# Altium PCB PCB-FPGA.PcbDoc
Units mil, origin at the board's own origin, x right, y up, seen from the top; angles counter-clockwise.
Board outline 6000 x 4000 mil, 2 copper layers (Top Layer, Bottom Layer); 316 components, 208 nets, 804 pads, 0 vias.
Unrouted connection lines stored in the file: 144.
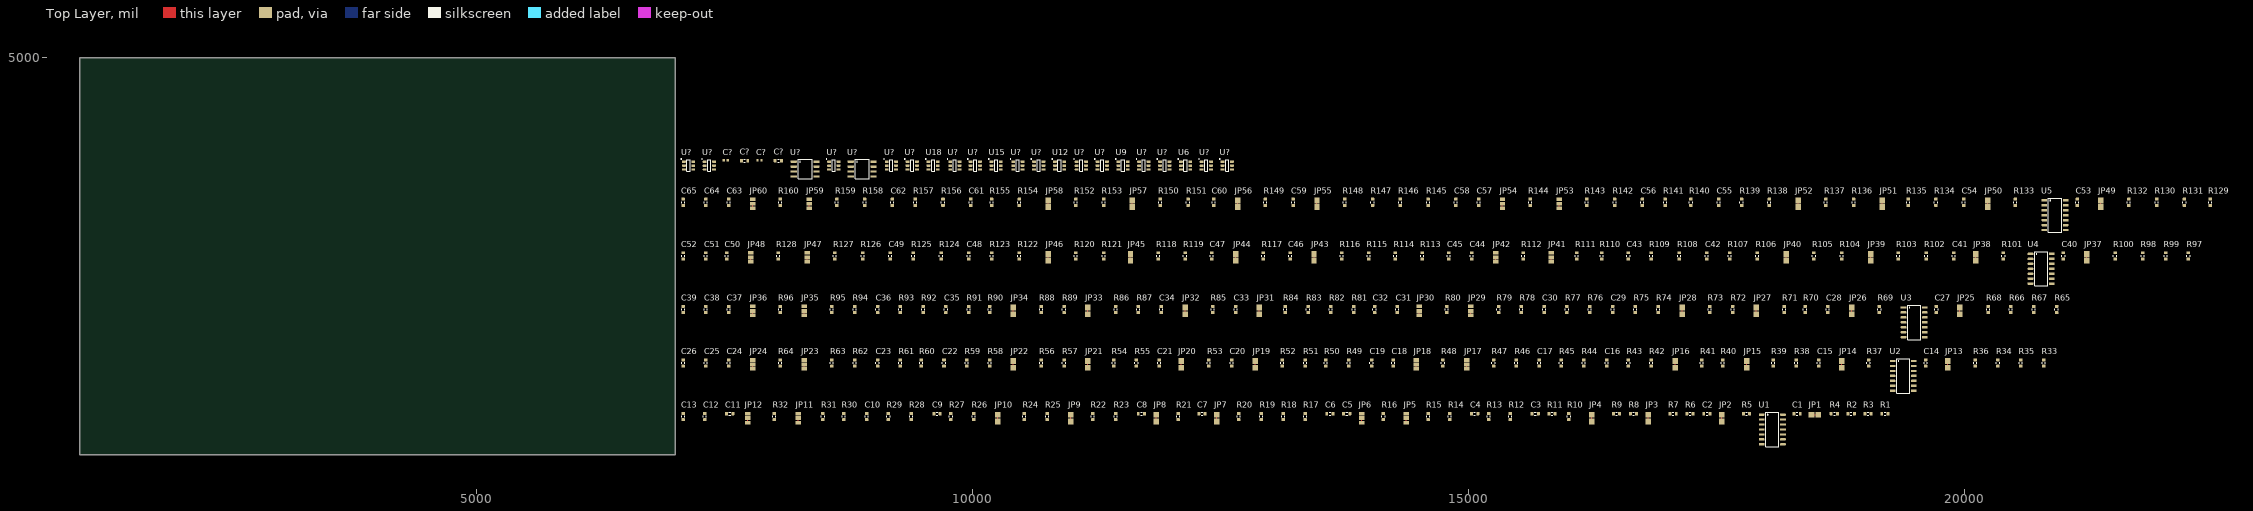
[diagram p0: Top Layer view]
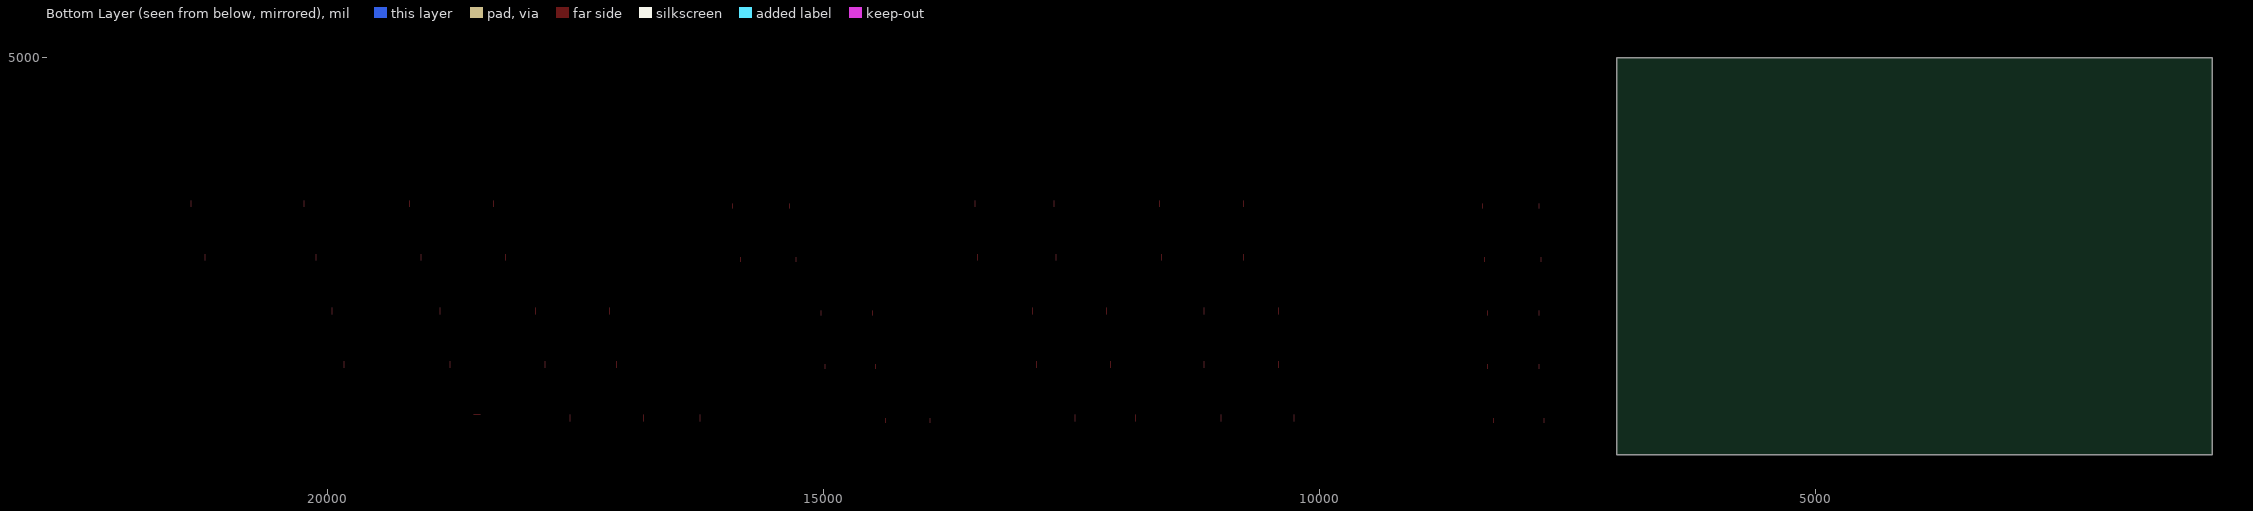
[diagram p1: Bottom Layer view, seen from below]

## Layer stack, top to bottom
Top Solder: solder mask 0.4, Solder Resist, Dk 3.5
Top Layer: signal copper 1.4
Dielectric 1: dielectric 12.6, FR-4, Dk 4.8
Bottom Layer: signal copper 1.4
Bottom Solder: solder mask 0.4, Solder Resist, Dk 3.5

## Board outline
1000,1000 7000,1000 7000,5000 1000,5000

## Design rules (kind name [scope] priority, off if disabled: settings)
Clearance [All] p1: gap=10 ignorepadtopadclearanceinfootprint=FALSE except(0: Arc-Hole Track-Hole SMDPad-Hole THPad-Hole Via-Hole Fill-Hole Poly-Hole Region-Hole Text-Hole)
PolygonConnect [All] p1: connectstyle=Relief reliefconductorwidth=10 reliefentries=4 polygonreliefangle="90 Angle" airgapwidth=10
RoomDefinition FPGA-6 [InComponentClass('FPGA-6')] p1: confinementstyle=ConfineIn formatcopy=TRUE lockcomponents=FALSE outline 7045,3760 12650,3760 12650,4100 7045,4100
RoomDefinition FPGA-5 [InComponentClass('FPGA-5')] p2: confinementstyle=ConfineIn formatcopy=TRUE lockcomponents=FALSE outline 7045,3220 22685,3220 22685,3710 7045,3710
RoomDefinition FPGA-4 [InComponentClass('FPGA-4')] p3: confinementstyle=ConfineIn formatcopy=TRUE lockcomponents=FALSE outline 7045,2680 22415,2680 22415,3170 7045,3170
RoomDefinition FPGA-3 [InComponentClass('FPGA-3')] p4: confinementstyle=ConfineIn formatcopy=TRUE lockcomponents=FALSE outline 7045,2140 21085,2140 21085,2630 7045,2630
RoomDefinition FPGA-2 [InComponentClass('FPGA-2')] p5: confinementstyle=ConfineIn formatcopy=TRUE lockcomponents=FALSE outline 7045,1600 20955,1600 20955,2090 7045,2090
RoomDefinition FPGA-1 [InComponentClass('FPGA-1')] p6: confinementstyle=ConfineIn formatcopy=TRUE lockcomponents=FALSE outline 7045,1060 19260,1060 19260,1550 7045,1550
RoutingVias [All] p1: holewidth=28 width=50 viastyle="Through Hole" minholewidth=28 minwidth=50 maxholewidth=28 maxwidth=50
SolderMaskExpansion [All] p1: expansion=4
Width [All] p1: maxlimit=10 minlimit=10 preferedwidth=10
30 further rules are at their usual default settings.

## Classes and differential pairs
component class FPGA-6: C? U6 U9 U12 U15 U18 U?
component class FPGA-5: C53 C54 C55 C56 C57 C58 C59 C60 C61 C62 C63 C64 C65 JP49 JP50 JP51 JP52 JP53 JP54 JP55 JP56 JP57 JP58 JP59 JP60 R129 R130 R131 R132 R133 R134 R135 R136 R137 R138 R139 R140 R141 R142 R143 R144 R145 R146 R147 R148 R149 R150 R151 R152 R153 R154 R155 R156 R157 R158 R159 R160 U5
component class FPGA-4: C40 C41 C42 C43 C44 C45 C46 C47 C48 C49 C50 C51 C52 JP37 JP38 JP39 JP40 JP41 JP42 JP43 JP44 JP45 JP46 JP47 JP48 R97 R98 R99 R100 R101 R102 R103 R104 R105 R106 R107 R108 R109 R110 R111 R112 R113 R114 R115 R116 R117 R118 R119 R120 R121 R122 R123 R124 R125 R126 R127 R128 U4
component class FPGA-3: C27 C28 C29 C30 C31 C32 C33 C34 C35 C36 C37 C38 C39 JP25 JP26 JP27 JP28 JP29 JP30 JP31 JP32 JP33 JP34 JP35 JP36 R65 R66 R67 R68 R69 R70 R71 R72 R73 R74 R75 R76 R77 R78 R79 R80 R81 R82 R83 R84 R85 R86 R87 R88 R89 R90 R91 R92 R93 R94 R95 R96 U3
component class FPGA-2: C14 C15 C16 C17 C18 C19 C20 C21 C22 C23 C24 C25 C26 JP13 JP14 JP15 JP16 JP17 JP18 JP19 JP20 JP21 JP22 JP23 JP24 R33 R34 R35 R36 R37 R38 R39 R40 R41 R42 R43 R44 R45 R46 R47 R48 R49 R50 R51 R52 R53 R54 R55 R56 R57 R58 R59 R60 R61 R62 R63 R64 U2
component class FPGA-1: C1 C2 C3 C4 C5 C6 C7 C8 C9 C10 C11 C12 C13 JP1 JP2 JP3 JP4 JP5 JP6 JP7 JP8 JP9 JP10 JP11 JP12 R1 R2 R3 R4 R5 R6 R7 R8 R9 R10 R11 R12 R13 R14 R15 R16 R17 R18 R19 R20 R21 R22 R23 R24 R25 R26 R27 R28 R29 R30 R31 R32 U1

## Components (designator, comment, footprint, x,y, rotation, side; value= is the part's Value field where it differs from the comment)
C1 "47p" "CAPACITOR 1608 REFLOW" 18310,1415 r0 top
C2 "47p" "CAPACITOR 1608 REFLOW" 17400,1415 r0 top
C3 "2n2" "CAPACITOR 1608 REFLOW" 15670,1415 r0 top
C4 "2n2" "CAPACITOR 1608 REFLOW" 15060,1415 r0 top
C5 "47p" "CAPACITOR 1608 REFLOW" 13770,1415 r0 top
C6 "47p" "CAPACITOR 1608 REFLOW" 13600,1415 r0 top
C7 "47p" "CAPACITOR 1608 REFLOW" 12310,1415 r0 top
C8 "47p" "CAPACITOR 1608 REFLOW" 11700,1415 r0 top
C9 "2n2" "CAPACITOR 1608 REFLOW" 9640,1415 r0 top
C10 "2n2" "CAPACITOR 1608 REFLOW" 8930,1385 r90 top
C11 "47p" "CAPACITOR 1608 REFLOW" 7550,1415 r0 top
C12 "47p" "CAPACITOR 1608 REFLOW" 7300,1385 r90 top
C13 "100n" "CAPACITOR 1608 REFLOW" 7080,1385 r90 top
C14 "47p" "CAPACITOR 1608 REFLOW" 19605,1925 r90 top
C15 "47p" "CAPACITOR 1608 REFLOW" 18530,1925 r90 top
C16 "2n2" "CAPACITOR 1608 REFLOW" 16390,1925 r90 top
C17 "2n2" "CAPACITOR 1608 REFLOW" 15710,1925 r90 top
C18 "47p" "CAPACITOR 1608 REFLOW" 14240,1925 r90 top
C19 "47p" "CAPACITOR 1608 REFLOW" 14020,1925 r90 top
C20 "47p" "CAPACITOR 1608 REFLOW" 12610,1925 r90 top
C21 "47p" "CAPACITOR 1608 REFLOW" 11880,1925 r90 top
C22 "2n2" "CAPACITOR 1608 REFLOW" 9710,1925 r90 top
C23 "2n2" "CAPACITOR 1608 REFLOW" 9040,1925 r90 top
C24 "47p" "CAPACITOR 1608 REFLOW" 7540,1925 r90 top
C25 "47p" "CAPACITOR 1608 REFLOW" 7310,1925 r90 top
C26 "100n" "CAPACITOR 1608 REFLOW" 7080,1925 r90 top
C27 "47p" "CAPACITOR 1608 REFLOW" 19715,2465 r90 top
C28 "47p" "CAPACITOR 1608 REFLOW" 18620,2465 r90 top
C29 "2n2" "CAPACITOR 1608 REFLOW" 16450,2465 r90 top
C30 "2n2" "CAPACITOR 1608 REFLOW" 15760,2465 r90 top
C31 "47p" "CAPACITOR 1608 REFLOW" 14280,2465 r90 top
C32 "47p" "CAPACITOR 1608 REFLOW" 14050,2465 r90 top
C33 "47p" "CAPACITOR 1608 REFLOW" 12650,2465 r90 top
C34 "47p" "CAPACITOR 1608 REFLOW" 11900,2465 r90 top
C35 "2n2" "CAPACITOR 1608 REFLOW" 9730,2465 r90 top
C36 "2n2" "CAPACITOR 1608 REFLOW" 9040,2465 r90 top
C37 "47p" "CAPACITOR 1608 REFLOW" 7540,2465 r90 top
C38 "47p" "CAPACITOR 1608 REFLOW" 7310,2465 r90 top
C39 "100n" "CAPACITOR 1608 REFLOW" 7080,2465 r90 top
C40 "47p" "CAPACITOR 1608 REFLOW" 20995,3005 r90 top
C41 "47p" "CAPACITOR 1608 REFLOW" 19890,3005 r90 top
C42 "2n2" "CAPACITOR 1608 REFLOW" 17400,3005 r90 top
C43 "2n2" "CAPACITOR 1608 REFLOW" 16610,3005 r90 top
C44 "47p" "CAPACITOR 1608 REFLOW" 15030,3005 r90 top
C45 "47p" "CAPACITOR 1608 REFLOW" 14800,3005 r90 top
C46 "47p" "CAPACITOR 1608 REFLOW" 13200,3005 r90 top
C47 "47p" "CAPACITOR 1608 REFLOW" 12410,3005 r90 top
C48 "2n2" "CAPACITOR 1608 REFLOW" 9960,3005 r90 top
C49 "2n2" "CAPACITOR 1608 REFLOW" 9170,3005 r90 top
C50 "47p" "CAPACITOR 1608 REFLOW" 7520,3005 r90 top
C51 "47p" "CAPACITOR 1608 REFLOW" 7310,3005 r90 top
C52 "100n" "CAPACITOR 1608 REFLOW" 7080,3005 r90 top
C53 "47p" "CAPACITOR 1608 REFLOW" 21135,3545 r90 top
C54 "47p" "CAPACITOR 1608 REFLOW" 19990,3545 r90 top
C55 "2n2" "CAPACITOR 1608 REFLOW" 17520,3545 r90 top
C56 "2n2" "CAPACITOR 1608 REFLOW" 16750,3545 r90 top
C57 "47p" "CAPACITOR 1608 REFLOW" 15100,3545 r90 top
C58 "47p" "CAPACITOR 1608 REFLOW" 14870,3545 r90 top
C59 "47p" "CAPACITOR 1608 REFLOW" 13230,3545 r90 top
C60 "47p" "CAPACITOR 1608 REFLOW" 12430,3545 r90 top
C61 "2n2" "CAPACITOR 1608 REFLOW" 9980,3545 r90 top
C62 "2n2" "CAPACITOR 1608 REFLOW" 9190,3545 r90 top
C63 "47p" "CAPACITOR 1608 REFLOW" 7540,3545 r90 top
C64 "47p" "CAPACITOR 1608 REFLOW" 7310,3545 r90 top
C65 "100n" "CAPACITOR 1608 REFLOW" 7080,3545 r90 top
C? "10uF" "CAPACITOR 1608 REFLOW" 7700,3965 r0 top
C? "100nF" "CAPACITOR 1005 REFLOW" 7510,3970 r0 top
C? "10uF" "CAPACITOR 1608 REFLOW" 8040,3965 r0 top
C? "100nF" "CAPACITOR 1005 REFLOW" 7850,3970 r0 top
JP1 "NC" "JUMPER2 SMD 2012 Connected" 18490,1405 r0 top
JP2 "NC" "JUMPER2 SMD 2012 Connected" 17550,1370 r90 top
JP3 "NC" "JUMPER2 SMD 2012 Connected" 16810,1370 r90 top
JP4 "NC" "JUMPER2 SMD 2012 Connected" 16240,1370 r90 top
JP5 "{Value}" "JUMPER3 SMD 2012 Connected" 14370,1370 r90 top
JP6 "{Value}" "JUMPER3 SMD 2012 Connected" 13920,1370 r90 top
JP7 "NC" "JUMPER2 SMD 2012 Connected" 12460,1370 r90 top
JP8 "NC" "JUMPER2 SMD 2012 Connected" 11850,1370 r90 top
JP9 "NC" "JUMPER2 SMD 2012 Connected" 10990,1370 r90 top
JP10 "NC" "JUMPER2 SMD 2012 Connected" 10250,1370 r90 top
JP11 "{Value}" "JUMPER3 SMD 2012 Connected" 8240,1370 r90 top
JP12 "{Value}" "JUMPER3 SMD 2012 Connected" 7730,1370 r90 top
JP13 "NC" "JUMPER2 SMD 2012 Connected" 19830,1910 r90 top
JP14 "NC" "JUMPER2 SMD 2012 Connected" 18760,1910 r90 top
JP15 "NC" "JUMPER2 SMD 2012 Connected" 17800,1910 r90 top
JP16 "NC" "JUMPER2 SMD 2012 Connected" 17080,1910 r90 top
JP17 "{Value}" "JUMPER3 SMD 2012 Connected" 14980,1910 r90 top
JP18 "{Value}" "JUMPER3 SMD 2012 Connected" 14470,1910 r90 top
JP19 "NC" "JUMPER2 SMD 2012 Connected" 12850,1910 r90 top
JP20 "NC" "JUMPER2 SMD 2012 Connected" 12100,1910 r90 top
JP21 "NC" "JUMPER2 SMD 2012 Connected" 11160,1910 r90 top
JP22 "NC" "JUMPER2 SMD 2012 Connected" 10410,1910 r90 top
JP23 "{Value}" "JUMPER3 SMD 2012 Connected" 8300,1910 r90 top
JP24 "{Value}" "JUMPER3 SMD 2012 Connected" 7780,1910 r90 top
JP25 "NC" "JUMPER2 SMD 2012 Connected" 19950,2450 r90 top
JP26 "NC" "JUMPER2 SMD 2012 Connected" 18860,2450 r90 top
JP27 "NC" "JUMPER2 SMD 2012 Connected" 17900,2450 r90 top
JP28 "NC" "JUMPER2 SMD 2012 Connected" 17150,2450 r90 top
JP29 "{Value}" "JUMPER3 SMD 2012 Connected" 15020,2450 r90 top
JP30 "{Value}" "JUMPER3 SMD 2012 Connected" 14500,2450 r90 top
JP31 "NC" "JUMPER2 SMD 2012 Connected" 12890,2450 r90 top
JP32 "NC" "JUMPER2 SMD 2012 Connected" 12140,2450 r90 top
JP33 "NC" "JUMPER2 SMD 2012 Connected" 11160,2450 r90 top
JP34 "NC" "JUMPER2 SMD 2012 Connected" 10410,2450 r90 top
JP35 "{Value}" "JUMPER3 SMD 2012 Connected" 8300,2450 r90 top
JP36 "{Value}" "JUMPER3 SMD 2012 Connected" 7780,2450 r90 top
JP37 "NC" "JUMPER2 SMD 2012 Connected" 21230,2990 r90 top
JP38 "NC" "JUMPER2 SMD 2012 Connected" 20110,2990 r90 top
JP39 "NC" "JUMPER2 SMD 2012 Connected" 19050,2990 r90 top
JP40 "NC" "JUMPER2 SMD 2012 Connected" 18200,2990 r90 top
JP41 "{Value}" "JUMPER3 SMD 2012 Connected" 15830,2990 r90 top
JP42 "{Value}" "JUMPER3 SMD 2012 Connected" 15270,2990 r90 top
JP43 "NC" "JUMPER2 SMD 2012 Connected" 13440,2990 r90 top
JP44 "NC" "JUMPER2 SMD 2012 Connected" 12650,2990 r90 top
JP45 "NC" "JUMPER2 SMD 2012 Connected" 11590,2990 r90 top
JP46 "NC" "JUMPER2 SMD 2012 Connected" 10760,2990 r90 top
JP47 "{Value}" "JUMPER3 SMD 2012 Connected" 8330,2990 r90 top
JP48 "{Value}" "JUMPER3 SMD 2012 Connected" 7760,2990 r90 top
JP49 "NC" "JUMPER2 SMD 2012 Connected" 21370,3530 r90 top
JP50 "NC" "JUMPER2 SMD 2012 Connected" 20230,3530 r90 top
JP51 "NC" "JUMPER2 SMD 2012 Connected" 19170,3530 r90 top
JP52 "NC" "JUMPER2 SMD 2012 Connected" 18320,3530 r90 top
JP53 "{Value}" "JUMPER3 SMD 2012 Connected" 15910,3530 r90 top
JP54 "{Value}" "JUMPER3 SMD 2012 Connected" 15340,3530 r90 top
JP55 "NC" "JUMPER2 SMD 2012 Connected" 13470,3530 r90 top
JP56 "NC" "JUMPER2 SMD 2012 Connected" 12670,3530 r90 top
JP57 "NC" "JUMPER2 SMD 2012 Connected" 11610,3530 r90 top
JP58 "NC" "JUMPER2 SMD 2012 Connected" 10760,3530 r90 top
JP59 "{Value}" "JUMPER3 SMD 2012 Connected" 8350,3530 r90 top
JP60 "{Value}" "JUMPER3 SMD 2012 Connected" 7780,3530 r90 top
R1 "18k" "RESISTOR 1608 REFLOW" 19195,1415 r0 top
R2 "18k" "RESISTOR 1608 REFLOW" 18855,1415 r0 top
R3 "DNP" "RESISTOR 1608 REFLOW" 19025,1415 r0 top
R4 "DNP" "RESISTOR 1608 REFLOW" 18685,1415 r0 top
R5 "8k2" "RESISTOR 1608 REFLOW" 17800,1415 r0 top
R6 "8k2" "RESISTOR 1608 REFLOW" 17230,1415 r0 top
R7 "82R" "RESISTOR 1608 REFLOW" 17060,1415 r0 top
R8 "82R" "RESISTOR 1608 REFLOW" 16660,1415 r0 top
R9 "8k2" "RESISTOR 1608 REFLOW" 16490,1415 r0 top
R10 "8k2" "RESISTOR 1608 REFLOW" 16010,1385 r90 top
R11 "10k" "RESISTOR 1608 REFLOW" 15840,1415 r0 top
R12 "10k" "RESISTOR 1608 REFLOW" 15420,1385 r90 top
R13 "DNP" "RESISTOR 1608 REFLOW" 15200,1385 r90 top
R14 "DNP" "RESISTOR 1608 REFLOW" 14810,1385 r90 top
R15 "18k" "RESISTOR 1608 REFLOW" 14590,1385 r90 top
R16 "18k" "RESISTOR 1608 REFLOW" 14140,1385 r90 top
R17 "18k" "RESISTOR 1608 REFLOW" 13350,1385 r90 top
R18 "DNP" "RESISTOR 1608 REFLOW" 13130,1385 r90 top
R19 "18k" "RESISTOR 1608 REFLOW" 12910,1385 r90 top
R20 "DNP" "RESISTOR 1608 REFLOW" 12680,1385 r90 top
R21 "8k2" "RESISTOR 1608 REFLOW" 12070,1385 r90 top
R22 "8k2" "RESISTOR 1608 REFLOW" 11210,1385 r90 top
R23 "82R" "RESISTOR 1608 REFLOW" 11440,1385 r90 top
R24 "82R" "RESISTOR 1608 REFLOW" 10520,1385 r90 top
R25 "8k2" "RESISTOR 1608 REFLOW" 10750,1385 r90 top
R26 "8k2" "RESISTOR 1608 REFLOW" 10010,1385 r90 top
R27 "10k" "RESISTOR 1608 REFLOW" 9780,1385 r90 top
R28 "DNP" "RESISTOR 1608 REFLOW" 9380,1385 r90 top
R29 "10k" "RESISTOR 1608 REFLOW" 9150,1385 r90 top
R30 "DNP" "RESISTOR 1608 REFLOW" 8700,1385 r90 top
R31 "18k" "RESISTOR 1608 REFLOW" 8490,1385 r90 top
R32 "18k" "RESISTOR 1608 REFLOW" 8000,1385 r90 top
R33 "18k" "RESISTOR 1608 REFLOW" 20795,1925 r90 top
R34 "18k" "RESISTOR 1608 REFLOW" 20335,1925 r90 top
R35 "DNP" "RESISTOR 1608 REFLOW" 20565,1925 r90 top
R36 "DNP" "RESISTOR 1608 REFLOW" 20105,1925 r90 top
R37 "8k2" "RESISTOR 1608 REFLOW" 19030,1925 r90 top
R38 "8k2" "RESISTOR 1608 REFLOW" 18300,1925 r90 top
R39 "82R" "RESISTOR 1608 REFLOW" 18070,1925 r90 top
R40 "82R" "RESISTOR 1608 REFLOW" 17560,1925 r90 top
R41 "8k2" "RESISTOR 1608 REFLOW" 17350,1925 r90 top
R42 "8k2" "RESISTOR 1608 REFLOW" 16840,1925 r90 top
R43 "10k" "RESISTOR 1608 REFLOW" 16610,1925 r90 top
R44 "10k" "RESISTOR 1608 REFLOW" 16160,1925 r90 top
R45 "DNP" "RESISTOR 1608 REFLOW" 15930,1925 r90 top
R46 "DNP" "RESISTOR 1608 REFLOW" 15480,1925 r90 top
R47 "18k" "RESISTOR 1608 REFLOW" 15250,1925 r90 top
R48 "18k" "RESISTOR 1608 REFLOW" 14740,1925 r90 top
R49 "18k" "RESISTOR 1608 REFLOW" 13790,1925 r90 top
R50 "DNP" "RESISTOR 1608 REFLOW" 13560,1925 r90 top
R51 "18k" "RESISTOR 1608 REFLOW" 13350,1925 r90 top
R52 "DNP" "RESISTOR 1608 REFLOW" 13120,1925 r90 top
R53 "8k2" "RESISTOR 1608 REFLOW" 12380,1925 r90 top
R54 "8k2" "RESISTOR 1608 REFLOW" 11420,1925 r90 top
R55 "82R" "RESISTOR 1608 REFLOW" 11650,1925 r90 top
R56 "82R" "RESISTOR 1608 REFLOW" 10690,1925 r90 top
R57 "8k2" "RESISTOR 1608 REFLOW" 10920,1925 r90 top
R58 "8k2" "RESISTOR 1608 REFLOW" 10170,1925 r90 top
R59 "10k" "RESISTOR 1608 REFLOW" 9940,1925 r90 top
R60 "DNP" "RESISTOR 1608 REFLOW" 9480,1925 r90 top
R61 "10k" "RESISTOR 1608 REFLOW" 9270,1925 r90 top
R62 "DNP" "RESISTOR 1608 REFLOW" 8810,1925 r90 top
R63 "18k" "RESISTOR 1608 REFLOW" 8580,1925 r90 top
R64 "18k" "RESISTOR 1608 REFLOW" 8060,1925 r90 top
R65 "18k" "RESISTOR 1608 REFLOW" 20925,2465 r90 top
R66 "18k" "RESISTOR 1608 REFLOW" 20465,2465 r90 top
R67 "DNP" "RESISTOR 1608 REFLOW" 20695,2465 r90 top
R68 "DNP" "RESISTOR 1608 REFLOW" 20235,2465 r90 top
R69 "8k2" "RESISTOR 1608 REFLOW" 19140,2465 r90 top
R70 "8k2" "RESISTOR 1608 REFLOW" 18390,2465 r90 top
R71 "82R" "RESISTOR 1608 REFLOW" 18180,2465 r90 top
R72 "82R" "RESISTOR 1608 REFLOW" 17660,2465 r90 top
R73 "8k2" "RESISTOR 1608 REFLOW" 17430,2465 r90 top
R74 "8k2" "RESISTOR 1608 REFLOW" 16910,2465 r90 top
R75 "10k" "RESISTOR 1608 REFLOW" 16680,2465 r90 top
R76 "10k" "RESISTOR 1608 REFLOW" 16220,2465 r90 top
R77 "DNP" "RESISTOR 1608 REFLOW" 15990,2465 r90 top
R78 "DNP" "RESISTOR 1608 REFLOW" 15530,2465 r90 top
R79 "18k" "RESISTOR 1608 REFLOW" 15300,2465 r90 top
R80 "18k" "RESISTOR 1608 REFLOW" 14780,2465 r90 top
R81 "18k" "RESISTOR 1608 REFLOW" 13840,2465 r90 top
R82 "DNP" "RESISTOR 1608 REFLOW" 13610,2465 r90 top
R83 "18k" "RESISTOR 1608 REFLOW" 13380,2465 r90 top
R84 "DNP" "RESISTOR 1608 REFLOW" 13150,2465 r90 top
R85 "8k2" "RESISTOR 1608 REFLOW" 12420,2465 r90 top
R86 "8k2" "RESISTOR 1608 REFLOW" 11440,2465 r90 top
R87 "82R" "RESISTOR 1608 REFLOW" 11670,2465 r90 top
R88 "82R" "RESISTOR 1608 REFLOW" 10690,2465 r90 top
R89 "8k2" "RESISTOR 1608 REFLOW" 10920,2465 r90 top
R90 "8k2" "RESISTOR 1608 REFLOW" 10170,2465 r90 top
R91 "10k" "RESISTOR 1608 REFLOW" 9960,2465 r90 top
R92 "DNP" "RESISTOR 1608 REFLOW" 9500,2465 r90 top
R93 "10k" "RESISTOR 1608 REFLOW" 9270,2465 r90 top
R94 "DNP" "RESISTOR 1608 REFLOW" 8810,2465 r90 top
R95 "18k" "RESISTOR 1608 REFLOW" 8580,2465 r90 top
R96 "18k" "RESISTOR 1608 REFLOW" 8060,2465 r90 top
R97 "18k" "RESISTOR 1608 REFLOW" 22255,3005 r90 top
R98 "18k" "RESISTOR 1608 REFLOW" 21795,3005 r90 top
R99 "DNP" "RESISTOR 1608 REFLOW" 22025,3005 r90 top
R100 "DNP" "RESISTOR 1608 REFLOW" 21515,3005 r90 top
R101 "8k2" "RESISTOR 1608 REFLOW" 20390,3005 r90 top
R102 "8k2" "RESISTOR 1608 REFLOW" 19610,3005 r90 top
R103 "82R" "RESISTOR 1608 REFLOW" 19330,3005 r90 top
R104 "82R" "RESISTOR 1608 REFLOW" 18760,3005 r90 top
R105 "8k2" "RESISTOR 1608 REFLOW" 18480,3005 r90 top
R106 "8k2" "RESISTOR 1608 REFLOW" 17910,3005 r90 top
R107 "10k" "RESISTOR 1608 REFLOW" 17630,3005 r90 top
R108 "10k" "RESISTOR 1608 REFLOW" 17120,3005 r90 top
R109 "DNP" "RESISTOR 1608 REFLOW" 16840,3005 r90 top
R110 "DNP" "RESISTOR 1608 REFLOW" 16340,3005 r90 top
R111 "18k" "RESISTOR 1608 REFLOW" 16090,3005 r90 top
R112 "18k" "RESISTOR 1608 REFLOW" 15550,3005 r90 top
R113 "18k" "RESISTOR 1608 REFLOW" 14530,3005 r90 top
R114 "DNP" "RESISTOR 1608 REFLOW" 14260,3005 r90 top
R115 "18k" "RESISTOR 1608 REFLOW" 13990,3005 r90 top
R116 "DNP" "RESISTOR 1608 REFLOW" 13720,3005 r90 top
R117 "8k2" "RESISTOR 1608 REFLOW" 12930,3005 r90 top
R118 "8k2" "RESISTOR 1608 REFLOW" 11870,3005 r90 top
R119 "82R" "RESISTOR 1608 REFLOW" 12140,3005 r90 top
R120 "82R" "RESISTOR 1608 REFLOW" 11040,3005 r90 top
R121 "8k2" "RESISTOR 1608 REFLOW" 11320,3005 r90 top
R122 "8k2" "RESISTOR 1608 REFLOW" 10470,3005 r90 top
R123 "10k" "RESISTOR 1608 REFLOW" 10190,3005 r90 top
R124 "DNP" "RESISTOR 1608 REFLOW" 9680,3005 r90 top
R125 "10k" "RESISTOR 1608 REFLOW" 9400,3005 r90 top
R126 "DNP" "RESISTOR 1608 REFLOW" 8890,3005 r90 top
R127 "18k" "RESISTOR 1608 REFLOW" 8610,3005 r90 top
R128 "18k" "RESISTOR 1608 REFLOW" 8040,3005 r90 top
R129 "18k" "RESISTOR 1608 REFLOW" 22475,3545 r90 top
R130 "18k" "RESISTOR 1608 REFLOW" 21935,3545 r90 top
R131 "DNP" "RESISTOR 1608 REFLOW" 22215,3545 r90 top
R132 "DNP" "RESISTOR 1608 REFLOW" 21655,3545 r90 top
R133 "8k2" "RESISTOR 1608 REFLOW" 20510,3545 r90 top
R134 "8k2" "RESISTOR 1608 REFLOW" 19710,3545 r90 top
R135 "82R" "RESISTOR 1608 REFLOW" 19430,3545 r90 top
R136 "82R" "RESISTOR 1608 REFLOW" 18880,3545 r90 top
R137 "8k2" "RESISTOR 1608 REFLOW" 18600,3545 r90 top
R138 "8k2" "RESISTOR 1608 REFLOW" 18030,3545 r90 top
R139 "10k" "RESISTOR 1608 REFLOW" 17750,3545 r90 top
R140 "10k" "RESISTOR 1608 REFLOW" 17240,3545 r90 top
R141 "DNP" "RESISTOR 1608 REFLOW" 16980,3545 r90 top
R142 "DNP" "RESISTOR 1608 REFLOW" 16470,3545 r90 top
R143 "18k" "RESISTOR 1608 REFLOW" 16190,3545 r90 top
R144 "18k" "RESISTOR 1608 REFLOW" 15620,3545 r90 top
R145 "18k" "RESISTOR 1608 REFLOW" 14590,3545 r90 top
R146 "DNP" "RESISTOR 1608 REFLOW" 14310,3545 r90 top
R147 "18k" "RESISTOR 1608 REFLOW" 14030,3545 r90 top
R148 "DNP" "RESISTOR 1608 REFLOW" 13750,3545 r90 top
R149 "8k2" "RESISTOR 1608 REFLOW" 12950,3545 r90 top
R150 "8k2" "RESISTOR 1608 REFLOW" 11890,3545 r90 top
R151 "82R" "RESISTOR 1608 REFLOW" 12170,3545 r90 top
R152 "82R" "RESISTOR 1608 REFLOW" 11040,3545 r90 top
R153 "8k2" "RESISTOR 1608 REFLOW" 11320,3545 r90 top
R154 "8k2" "RESISTOR 1608 REFLOW" 10470,3545 r90 top
R155 "10k" "RESISTOR 1608 REFLOW" 10190,3545 r90 top
R156 "DNP" "RESISTOR 1608 REFLOW" 9700,3545 r90 top
R157 "10k" "RESISTOR 1608 REFLOW" 9420,3545 r90 top
R158 "DNP" "RESISTOR 1608 REFLOW" 8910,3545 r90 top
R159 "18k" "RESISTOR 1608 REFLOW" 8630,3545 r90 top
R160 "18k" "RESISTOR 1608 REFLOW" 8060,3545 r90 top
U1 "*" "SO14 P1.27 C4.0X8.8 H1.75" 18060,1255 r0 top
U2 "*" "SO14 P1.27 C4.0X8.8 H1.75" 19380,1795 r0 top
U3 "*" "SO14 P1.27 C4.0X8.8 H1.75" 19490,2335 r0 top
U4 "*" "SO14 P1.27 C4.0X8.8 H1.75" 20770,2875 r0 top
U5 "*" "SO14 P1.27 C4.0X8.8 H1.75" 20910,3415 r0 top
U6 "ADS7886SBDCKT" "SOT23-6 P0.95 C1.5x3.0 H1.3" 12145,3915 r0 top
U9 "ADS7886SBDCKT" "SOT23-6 P0.95 C1.5x3.0 H1.3" 11515,3915 r0 top
U12 "ADS7886SBDCKT" "SOT23-6 P0.95 C1.5x3.0 H1.3" 10875,3915 r0 top
U15 "ADS7886SBDCKT" "SOT23-6 P0.95 C1.5x3.0 H1.3" 10235,3915 r0 top
U18 "ADS7886SBDCKT" "SOT23-6 P0.95 C1.5x3.0 H1.3" 9600,3915 r0 top
U? "ADS7886SBDCKT" "SOT23-6 P0.95 C1.5x3.0 H1.3" 12355,3915 r0 top
U? "ADS7886SBDCKT" "SOT23-6 P0.95 C1.5x3.0 H1.3" 11725,3915 r0 top
U? "ADS7886SBDCKT" "SOT23-6 P0.95 C1.5x3.0 H1.3" 11095,3915 r0 top
U? "ADS7886SBDCKT" "SOT23-6 P0.95 C1.5x3.0 H1.3" 10455,3915 r0 top
U? "ADS7886SBDCKT" "SOT23-6 P0.95 C1.5x3.0 H1.3" 9820,3915 r0 top
U? "ADS7886SBDCKT" "SOT23-6 P0.95 C1.5x3.0 H1.3" 12565,3915 r0 top
U? "ADS7886SBDCKT" "SOT23-6 P0.95 C1.5x3.0 H1.3" 11935,3915 r0 top
U? "ADS7886SBDCKT" "SOT23-6 P0.95 C1.5x3.0 H1.3" 11305,3915 r0 top
U? "ADS7886SBDCKT" "SOT23-6 P0.95 C1.5x3.0 H1.3" 10665,3915 r0 top
U? "ADS7886SBDCKT" "SOT23-6 P0.95 C1.5x3.0 H1.3" 10025,3915 r0 top
U? "ADS7886SBDCKT" "SOT23-6 P0.95 C1.5x3.0 H1.3" 9180,3915 r0 top
U? "ADS7886SBDCKT" "SOT23-6 P0.95 C1.5x3.0 H1.3" 8600,3915 r0 top
U? "ADS7886SBDCKT" "SOT23-6 P0.95 C1.5x3.0 H1.3" 7345,3915 r0 top
U? "ADS7886SBDCKT" "SOT23-6 P0.95 C1.5x3.0 H1.3" 7135,3915 r0 top
U? "ADS7886SBDCKT" "SOT23-6 P0.95 C1.5x3.0 H1.3" 9390,3915 r0 top
U? "LT1461ACS8" "SO8 P1.27 C4.0X5.0 H1.75" 8310,3880 r0 top
U? "LT1461ACS8" "SO8 P1.27 C4.0X5.0 H1.75" 8885,3880 r0 top

## Footprints (in the part's own frame and the unit in brackets; to place one, negate y for a bottom-side part, rotate by r counter-clockwise, add the part's x,y. Pads: shape width x height; smd on the part's side, far side on the other; paste and mask are expansions set on the pad)
"CAPACITOR 1005 REFLOW" [mm] "Capacitor SMD 1.0x0.5mm (0402-imperial)"
  rrect25% 0.6x0.6 smd: 1(-0.5,0) 2(0.5,0)
  body extent -0.5,-0.25 0.5,0.25, height 0.5
"CAPACITOR 1608 REFLOW" [mm] "Capacitor SMD 1.6x0.8mm (0603-imperial)"
  rrect25% 0.75x0.9 smd: 1(-0.8,0) 2(0.8,0)
  silkscreen extent -0.2,-0.4 0.2,0.4, body extent -0.8,-0.4 0.8,0.4, height 0.8
"JUMPER2 SMD 2012 Connected" [mm] "JUMPER SMD 2 LEADS 2012 (0805-Imperial)"
  rect 1.5x1.4 smd paste-0.8: 1(-0.85,0) 2(0.85,0)
  Top Layer lines w0.25: -0.8,0 0.8,0
"JUMPER3 SMD 2012 Connected" [mm] "JUMPER SMD 3 LEADS 2012 (0805-Imperial)"
  rect 0.9x1.4 smd paste-0.8: 1(-1.15,0) 3(1.15,0)
  rect 1x1.4 smd paste-0.8: 2(0,0)
  Top Layer lines w0.25: 0,0 -1.15,0 ; -1.15,0 -1.15,0
"RESISTOR 1608 REFLOW" [mm] "Resistor SMD 1.6x0.8mm (0603-imperial)"
  rrect25% 0.75x0.9 smd: 1(-0.8,0) 2(0.8,0)
  silkscreen extent -0.2,-0.4 0.2,0.4, body extent -0.77,-0.42 0.78,0.43, height 0.45
"SO8 P1.27 C4.0X5.0 H1.75" [mm] "8-Pin Small Outline Integrated Circuit 1.27 mm Pitch, IPC Medium Density"
  rrect50% 1.6x0.6 smd: 1(-2.921,1.905) 2(-2.921,0.635) 3(-2.921,-0.635) 4(-2.921,-1.905) 5(2.921,-1.905) 6(2.921,-0.635) 7(2.921,0.635) 8(2.921,1.905)
  silkscreen extent -1.8,-2.5 1.8,2.5, body extent -2,-2.5 2,2.5, height 1.76
"SO14 P1.27 C4.0X8.8 H1.75" [mm] "SOIC, 14-Leads, Body 4.0X8.8mm, Pitch 1.27mm, IPC Medium Density"
  rrect50% 1.45x0.6 smd: 1(-2.725,3.81) 2(-2.725,2.54) 3(-2.725,1.27) 4(-2.725,0) 5(-2.725,-1.27) 6(-2.725,-2.54) 7(-2.725,-3.81) 8(2.725,-3.81) 9(2.725,-2.54) 10(2.725,-1.27) 11(2.725,0) 12(2.725,1.27) 13(2.725,2.54) 14(2.725,3.81)
  silkscreen extent -1.7,-4.4 1.7,4.4, body extent -2,-4.4 2,4.4, height 1.76
"SOT23-6 P0.95 C1.5x3.0 H1.3" [mm] "SOT23, 6-Leads, Body 1.6x3.0mm, Pitch 0.95mm, IPC Medium Density"
  rrect50% 1x0.6 smd: 1(-1.2,1) 2(-1.2,0) 3(-1.2,-1) 4(1.2,-1) 5(1.2,0) 6(1.2,1)
  silkscreen extent -2,-1.5 0.4,1.8, body extent -0.8,-1.5 0.8,1.5, height 1.31

## Part data
C1 C2 C3 C4 C5 C6 C7 C8 C9 C10 C11 C12 C13 C14 C15 C16 C17 C18 C19 C20 C21 C22 C23 C24 C25 C26 C27 C28 C29 C30 C31 C32 C33 C34 C35 C36 C37 C38 C39 C40 C41 C42 C43 C44 C45 C46 C47 C48 C49 C50 C51 C52 C53 C54 C55 C56 C57 C58 C59 C60 C61 C62 C63 C64 C65: library part Capacitor, "Capacitor X7R 10% 50V 1608(0603)"
C? C? C? C?: library part Capacitor, "Capacitor"
JP1 JP2 JP3 JP4 JP7 JP8 JP9 JP10 JP13 JP14 JP15 JP16 JP19 JP20 JP21 JP22 JP25 JP26 JP27 JP28 JP31 JP32 JP33 JP34 JP37 JP38 JP39 JP40 JP43 JP44 JP45 JP46 JP49 JP50 JP51 JP52 JP55 JP56 JP57 JP58: library part "JUMPER 2 POS Connected", "JUMPER 2 POS"
JP5 JP6 JP11 JP12 JP17 JP18 JP23 JP24 JP29 JP30 JP35 JP36 JP41 JP42 JP47 JP48 JP53 JP54 JP59 JP60: library part "JUMPER 3 POS Connected", "JUMPER 3 POS"
R1 R2 R3 R4 R5 R6 R7 R8 R9 R10 R11 R12 R13 R14 R15 R16 R17 R18 R19 R20 R21 R22 R23 R24 R25 R26 R27 R28 R29 R30 R31 R32 R33 R34 R35 R36 R37 R38 R39 R40 R41 R42 R43 R44 R45 R46 R47 R48 R49 R50 R51 R52 R53 R54 R55 R56 R57 R58 R59 R60 R61 R62 R63 R64 R65 R66 R67 R68 R69 R70 R71 R72 R73 R74 R75 R76 R77 R78 R79 R80 R81 R82 R83 R84 R85 R86 R87 R88 R89 R90 R91 R92 R93 R94 R95 R96 R97 R98 R99 R100 R101 R102 R103 R104 R105 R106 R107 R108 R109 R110 R111 R112 R113 R114 R115 R116 R117 R118 R119 R120 R121 R122 R123 R124 R125 R126 R127 R128 R129 R130 R131 R132 R133 R134 R135 R136 R137 R138 R139 R140 R141 R142 R143 R144 R145 R146 R147 R148 R149 R150 R151 R152 R153 R154 R155 R156 R157 R158 R159 R160: library part Resistor, "Resistor 1% 50V 100mW 1608(0603)"
U1 U2 U3 U4 U5: library part "OPA QUAD", "Generic quad OPA 14 pins"
U6 U9 U12 U15 U18 U? U? U? U? U? U? U? U? U? U? U? U? U? U? U?: "12-Bit, 1-MSPS, Micro-Power, Miniature SAR Analog-to-Digital Converters"
U? U?: "Micropower Precision Low Dropout Series Voltage Reference Family"

## Nets (pads, with @x,y where several pads share a name; then routed paths per layer and width w, separated by ;. In a path a pad name is that pad's centre, name@x,y a point inside that pad or via, vN(x,y) a via of type N, cw(c..) or ccw(c..) an arc to the next point about the centre after c; other vN are vias at no path point)
+5V: U?.2@8195,3905 U?.2@8770,3905
GND_A: C55.1 C56.1 C57.1 C58.1 C61.1 C62.1 C63.1 C64.1 C?.2 JP53.3 JP54.3 JP59.3 JP60.3 R139.2 R140.2 R155.2 R157.2 U6.2 U9.2 U12.2 U15.2 U18.2 U?.2@7087.76,3915 U?.2@7297.76,3915 U?.2@8552.76,3915 U?.2@9132.76,3915 U?.2@9342.76,3915 U?.2@9772.76,3915 U?.2@9977.76,3915 U?.2@10407.76,3915 U?.2@10617.76,3915 U?.2@11047.76,3915 U?.2@11257.76,3915 U?.2@11677.76,3915 U?.2@11887.76,3915 U?.2@12307.76,3915 U?.2@12517.76,3915
NetC1_1: U1.1
NetC1_2: U1.2
NetC2_1: U1.14
NetC2_2: U1.13
NetC3_2: U12.3
NetC4_2: U6.3
NetC5_2: U1.3
NetC6_2: U1.12
NetC7_1: U1.7
NetC7_2: U1.6
NetC8_1: U1.8
NetC8_2: U1.9
NetC9_2: U15.3
NetC10_2: U9.3
NetC11_2: U1.5
NetC12_2: U1.10
NetC13_1: 
NetC13_2: 
NetC14_1: U2.1
NetC14_2: U2.2
NetC15_1: U2.14
NetC15_2: U2.13
NetC16_2: U?.3@8552.76,3875.63
NetC17_2: U18.3
NetC18_2: U2.3
NetC19_2: U2.12
NetC20_1: U2.7
NetC20_2: U2.6
NetC21_1: U2.8
NetC21_2: U2.9
NetC22_2: U?.3@7297.76,3875.63
NetC23_2: 
NetC24_2: U2.5
NetC25_2: U2.10
NetC26_1: 
NetC26_2: 
NetC27_1: U3.1
NetC27_2: U3.2
NetC28_1: U3.14
NetC28_2: U3.13
NetC29_2: U?.3@11677.76,3875.63
NetC30_2: U?.3@7087.76,3875.63
NetC31_2: U3.3
NetC32_2: U3.12
NetC33_1: U3.7
NetC33_2: U3.6
NetC34_1: U3.8
NetC34_2: U3.9
NetC35_2: U?.3@11047.76,3875.63
NetC36_2: U?.3@12307.76,3875.63
NetC37_2: U3.5
NetC38_2: U3.10
NetC39_1: 
NetC39_2: 
NetC40_1: U4.1
NetC40_2: U4.2
NetC41_1: U4.14
NetC41_2: U4.13
NetC42_2: U?.3@9342.76,3875.63
NetC43_2: 
NetC44_2: U4.3
NetC45_2: U4.12
NetC46_1: U4.7
NetC46_2: U4.6
NetC47_1: U4.8
NetC47_2: U4.9
NetC48_2: U?.3@12517.76,3875.63
NetC49_2: 
NetC50_2: U4.5
NetC51_2: U4.10
NetC52_1: 
NetC52_2: 
NetC53_1: C53.1 R135.1 U5.1
NetC53_2: C53.2 R129.1 R133.2 U5.2
NetC54_1: C54.1 R136.1 U5.14
NetC54_2: C54.2 R130.1 R134.2 U5.13
NetC55_2: C55.2 R129.2 R135.2 R139.1 U?.3@10617.76,3875.63
NetC56_2: C56.2 R130.2 R136.2 R140.1 U?.3@11887.76,3875.63
NetC57_2: C57.2 R137.2 R143.1 U5.3
NetC58_2: C58.2 R138.2 R144.1 U5.12
NetC59_1: C59.1 R151.1 U5.7
NetC59_2: C59.2 R145.1 R149.2 U5.6
NetC60_1: C60.1 R152.1 U5.8
NetC60_2: C60.2 R147.1 R150.2 U5.9
NetC61_2: C61.2 R145.2 R151.2 R155.1 U?.3@9977.76,3875.63
NetC62_2: C62.2 R147.2 R152.2 R157.1 U?.3@11257.76,3875.63
NetC63_2: C63.2 R153.2 R159.1 U5.5
NetC64_2: C64.2 R154.2 R160.1 U5.10
NetC65_1: C65.1 U5.11
NetC65_2: C65.2 U5.4
NetC?_1: C?.1
NetJP1_1: 
NetJP1_2: 
NetJP2_1: 
NetJP2_2: 
NetJP3_1: 
NetJP3_2: 
NetJP4_1: 
NetJP4_2: 
NetJP5_1: JP53.1 JP54.1 JP59.1 JP60.1
NetJP5_2: 
NetJP6_2: 
NetJP7_1: 
NetJP7_2: 
NetJP8_1: 
NetJP8_2: 
NetJP9_1: 
NetJP9_2: 
NetJP10_1: 
NetJP10_2: 
NetJP11_2: 
NetJP12_2: 
NetJP13_1: 
NetJP13_2: 
NetJP14_1: 
NetJP14_2: 
NetJP15_1: 
NetJP15_2: 
NetJP16_1: 
NetJP16_2: 
NetJP17_2: 
NetJP18_2: 
NetJP19_1: 
NetJP19_2: 
NetJP20_1: 
NetJP20_2: 
NetJP21_1: 
NetJP21_2: 
NetJP22_1: 
NetJP22_2: 
NetJP23_2: 
NetJP24_2: 
NetJP25_1: 
NetJP25_2: 
NetJP26_1: 
NetJP26_2: 
NetJP27_1: 
NetJP27_2: 
NetJP28_1: 
NetJP28_2: 
NetJP29_2: 
NetJP30_2: 
NetJP31_1: 
NetJP31_2: 
NetJP32_1: 
NetJP32_2: 
NetJP33_1: 
NetJP33_2: 
NetJP34_1: 
NetJP34_2: 
NetJP35_2: 
NetJP36_2: 
NetJP37_1: 
NetJP37_2: 
NetJP38_1: 
NetJP38_2: 
NetJP39_1: 
NetJP39_2: 
NetJP40_1: 
NetJP40_2: 
NetJP41_2: 
NetJP42_2: 
NetJP43_1: 
NetJP43_2: 
NetJP44_1: 
NetJP44_2: 
NetJP45_1: 
NetJP45_2: 
NetJP46_1: JP52.1 R142.1
NetJP46_2: 
NetJP47_2: 
NetJP48_2: 
NetJP49_1: JP49.1 R131.1
NetJP49_2: JP49.2 R131.2 R133.1
NetJP50_1: JP50.1 R132.1
NetJP50_2: JP50.2 R132.2 R134.1
NetJP51_1: JP51.1 R141.1
NetJP51_2: JP51.2 R137.1 R141.2
NetJP52_2: JP52.2 R138.1 R142.2
NetJP53_2: JP53.2 R143.2
NetJP54_2: JP54.2 R144.2
NetJP55_1: JP55.1 R146.1
NetJP55_2: JP55.2 R146.2 R149.1
NetJP56_1: JP56.1 R148.1
NetJP56_2: JP56.2 R148.2 R150.1
NetJP57_1: JP57.1 R156.1
NetJP57_2: JP57.2 R153.1 R156.2
NetJP58_1: JP58.1 R158.1
NetJP58_2: JP58.2 R154.1 R158.2
NetJP59_2: JP59.2 R159.2
NetJP60_2: JP60.2 R160.2
NetU6_4: U6.4 U9.4 U12.4 U15.4 U18.4 U?.4@7182.24,3875.63 U?.4@7392.24,3875.63 U?.4@8647.24,3875.63 U?.4@9227.24,3875.63 U?.4@9437.24,3875.63 U?.4@9867.24,3875.63 U?.4@10072.24,3875.63 U?.4@10502.24,3875.63 U?.4@10712.24,3875.63 U?.4@11142.24,3875.63 U?.4@11352.24,3875.63 U?.4@11772.24,3875.63 U?.4@11982.24,3875.63 U?.4@12402.24,3875.63 U?.4@12612.24,3875.63
NetU6_5: U6.5
NetU6_6: U6.6
NetU9_5: U9.5
NetU9_6: U9.6
NetU12_5: U12.5
NetU12_6: U12.6
NetU15_5: U15.5
NetU15_6: U15.6
NetU18_5: U18.5
NetU18_6: U18.6
NetU?_3: U?.3@9132.76,3875.63 U?.6@9227.24,3954.37
NetU?_5: U?.5@9227.24,3915
NetU?_6: U?.6@8647.24,3954.37
NetU?_6: U?.6@7392.24,3954.37
pads on no net: C1.1 C1.2 C2.1 C2.2 C3.1 C3.2 C4.1 C4.2 C5.1 C5.2 C6.1 C6.2 C7.1 C7.2 C8.1 C8.2 C9.1 C9.2 C10.1 C10.2 C11.1 C11.2 C12.1 C12.2 C13.1 C13.2 C14.1 C14.2 C15.1 C15.2 C16.1 C16.2 C17.1 C17.2 C18.1 C18.2 C19.1 C19.2 C20.1 C20.2 C21.1 C21.2 C22.1 C22.2 C23.1 C23.2 C24.1 C24.2 C25.1 C25.2 C26.1 C26.2 C27.1 C27.2 C28.1 C28.2 C29.1 C29.2 C30.1 C30.2 C31.1 C31.2 C32.1 C32.2 C33.1 C33.2 C34.1 C34.2 C35.1 C35.2 C36.1 C36.2 C37.1 C37.2 C38.1 C38.2 C39.1 C39.2 C40.1 C40.2 C41.1 C41.2 C42.1 C42.2 C43.1 C43.2 C44.1 C44.2 C45.1 C45.2 C46.1 C46.2 C47.1 C47.2 C48.1 C48.2 C49.1 C49.2 C50.1 C50.2 C51.1 C51.2 C52.1 C52.2 JP1.1 JP1.2 JP2.1 JP2.2 JP3.1 JP3.2 JP4.1 JP4.2 JP5.1 JP5.2 JP5.3 JP6.1 JP6.2 JP6.3 JP7.1 JP7.2 JP8.1 JP8.2 JP9.1 JP9.2 JP10.1 JP10.2 JP11.1 JP11.2 JP11.3 JP12.1 JP12.2 JP12.3 JP13.1 JP13.2 JP14.1 JP14.2 JP15.1 JP15.2 JP16.1 JP16.2 JP17.1 JP17.2 JP17.3 JP18.1 JP18.2 JP18.3 JP19.1 JP19.2 JP20.1 JP20.2 JP21.1 JP21.2 JP22.1 JP22.2 JP23.1 JP23.2 JP23.3 JP24.1 JP24.2 JP24.3 JP25.1 JP25.2 JP26.1 JP26.2 JP27.1 JP27.2 JP28.1 JP28.2 JP29.1 JP29.2 JP29.3 JP30.1 JP30.2 JP30.3 JP31.1 JP31.2 JP32.1 JP32.2 JP33.1 JP33.2 JP34.1 JP34.2 JP35.1 JP35.2 JP35.3 JP36.1 JP36.2 JP36.3 JP37.1 JP37.2 JP38.1 JP38.2 JP39.1 JP39.2 JP40.1 JP40.2 JP41.1 JP41.2 JP41.3 JP42.1 JP42.2 JP42.3 JP43.1 JP43.2 JP44.1 JP44.2 JP45.1 JP45.2 JP46.1 JP46.2 JP47.1 JP47.2 JP47.3 JP48.1 JP48.2 JP48.3 R1.1 R1.2 R2.1 R2.2 R3.1 R3.2 R4.1 R4.2 R5.1 R5.2 R6.1 R6.2 R7.1 R7.2 R8.1 R8.2 R9.1 R9.2 R10.1 R10.2 R11.1 R11.2 R12.1 R12.2 R13.1 R13.2 R14.1 R14.2 R15.1 R15.2 R16.1 R16.2 R17.1 R17.2 R18.1 R18.2 R19.1 R19.2 R20.1 R20.2 R21.1 R21.2 R22.1 R22.2 R23.1 R23.2 R24.1 R24.2 R25.1 R25.2 R26.1 R26.2 R27.1 R27.2 R28.1 R28.2 R29.1 R29.2 R30.1 R30.2 R31.1 R31.2 R32.1 R32.2 R33.1 R33.2 R34.1 R34.2 R35.1 R35.2 R36.1 R36.2 R37.1 R37.2 R38.1 R38.2 R39.1 R39.2 R40.1 R40.2 R41.1 R41.2 R42.1 R42.2 R43.1 R43.2 R44.1 R44.2 R45.1 R45.2 R46.1 R46.2 R47.1 R47.2 R48.1 R48.2 R49.1 R49.2 R50.1 R50.2 R51.1 R51.2 R52.1 R52.2 R53.1 R53.2 R54.1 R54.2 R55.1 R55.2 R56.1 R56.2 R57.1 R57.2 R58.1 R58.2 R59.1 R59.2 R60.1 R60.2 R61.1 R61.2 R62.1 R62.2 R63.1 R63.2 R64.1 R64.2 R65.1 R65.2 R66.1 R66.2 R67.1 R67.2 R68.1 R68.2 R69.1 R69.2 R70.1 R70.2 R71.1 R71.2 R72.1 R72.2 R73.1 R73.2 R74.1 R74.2 R75.1 R75.2 R76.1 R76.2 R77.1 R77.2 R78.1 R78.2 R79.1 R79.2 R80.1 R80.2 R81.1 R81.2 R82.1 R82.2 R83.1 R83.2 R84.1 R84.2 R85.1 R85.2 R86.1 R86.2 R87.1 R87.2 R88.1 R88.2 R89.1 R89.2 R90.1 R90.2 R91.1 R91.2 R92.1 R92.2 R93.1 R93.2 R94.1 R94.2 R95.1 R95.2 R96.1 R96.2 R97.1 R97.2 R98.1 R98.2 R99.1 R99.2 R100.1 R100.2 R101.1 R101.2 R102.1 R102.2 R103.1 R103.2 R104.1 R104.2 R105.1 R105.2 R106.1 R106.2 R107.1 R107.2 R108.1 R108.2 R109.1 R109.2 R110.1 R110.2 R111.1 R111.2 R112.1 R112.2 R113.1 R113.2 R114.1 R114.2 R115.1 R115.2 R116.1 R116.2 R117.1 R117.2 R118.1 R118.2 R119.1 R119.2 R120.1 R120.2 R121.1 R121.2 R122.1 R122.2 R123.1 R123.2 R124.1 R124.2 R125.1 R125.2 R126.1 R126.2 R127.1 R127.2 R128.1 R128.2 U1.4 U1.11 U2.4 U2.11 U3.4 U3.11 U4.4 U4.11 U6.1 U9.1 U12.1 U15.1 U18.1 U?.1 U?.3@8195,3855 U?.3@8770,3855 U?.3@9772.76,3875.63 U?.3@10407.76,3875.63 U?.4@8195,3805 U?.4@8770,3805 U?.5@7182.24,3915 U?.5@7392.24,3915 U?.5@8425,3805 U?.5@8647.24,3915 U?.5@9000,3805 U?.5@9437.24,3915 U?.5@9867.24,3915 U?.5@10072.24,3915 U?.5@10502.24,3915 U?.5@10712.24,3915 U?.5@11142.24,3915 U?.5@11352.24,3915 U?.5@11772.24,3915 U?.5@11982.24,3915 U?.5@12402.24,3915 U?.5@12612.24,3915 U?.6@7182.24,3954.37 U?.6@8425,3855 U?.6@9000,3855 U?.6@9437.24,3954.37 U?.6@9867.24,3954.37 U?.6@10072.24,3954.37 U?.6@10502.24,3954.37 U?.6@10712.24,3954.37 U?.6@11142.24,3954.37 U?.6@11352.24,3954.37 U?.6@11772.24,3954.37 U?.6@11982.24,3954.37 U?.6@12402.24,3954.37 U?.6@12612.24,3954.37 U?.7 U?.8